# Allegro board OSCILLATOR.brd
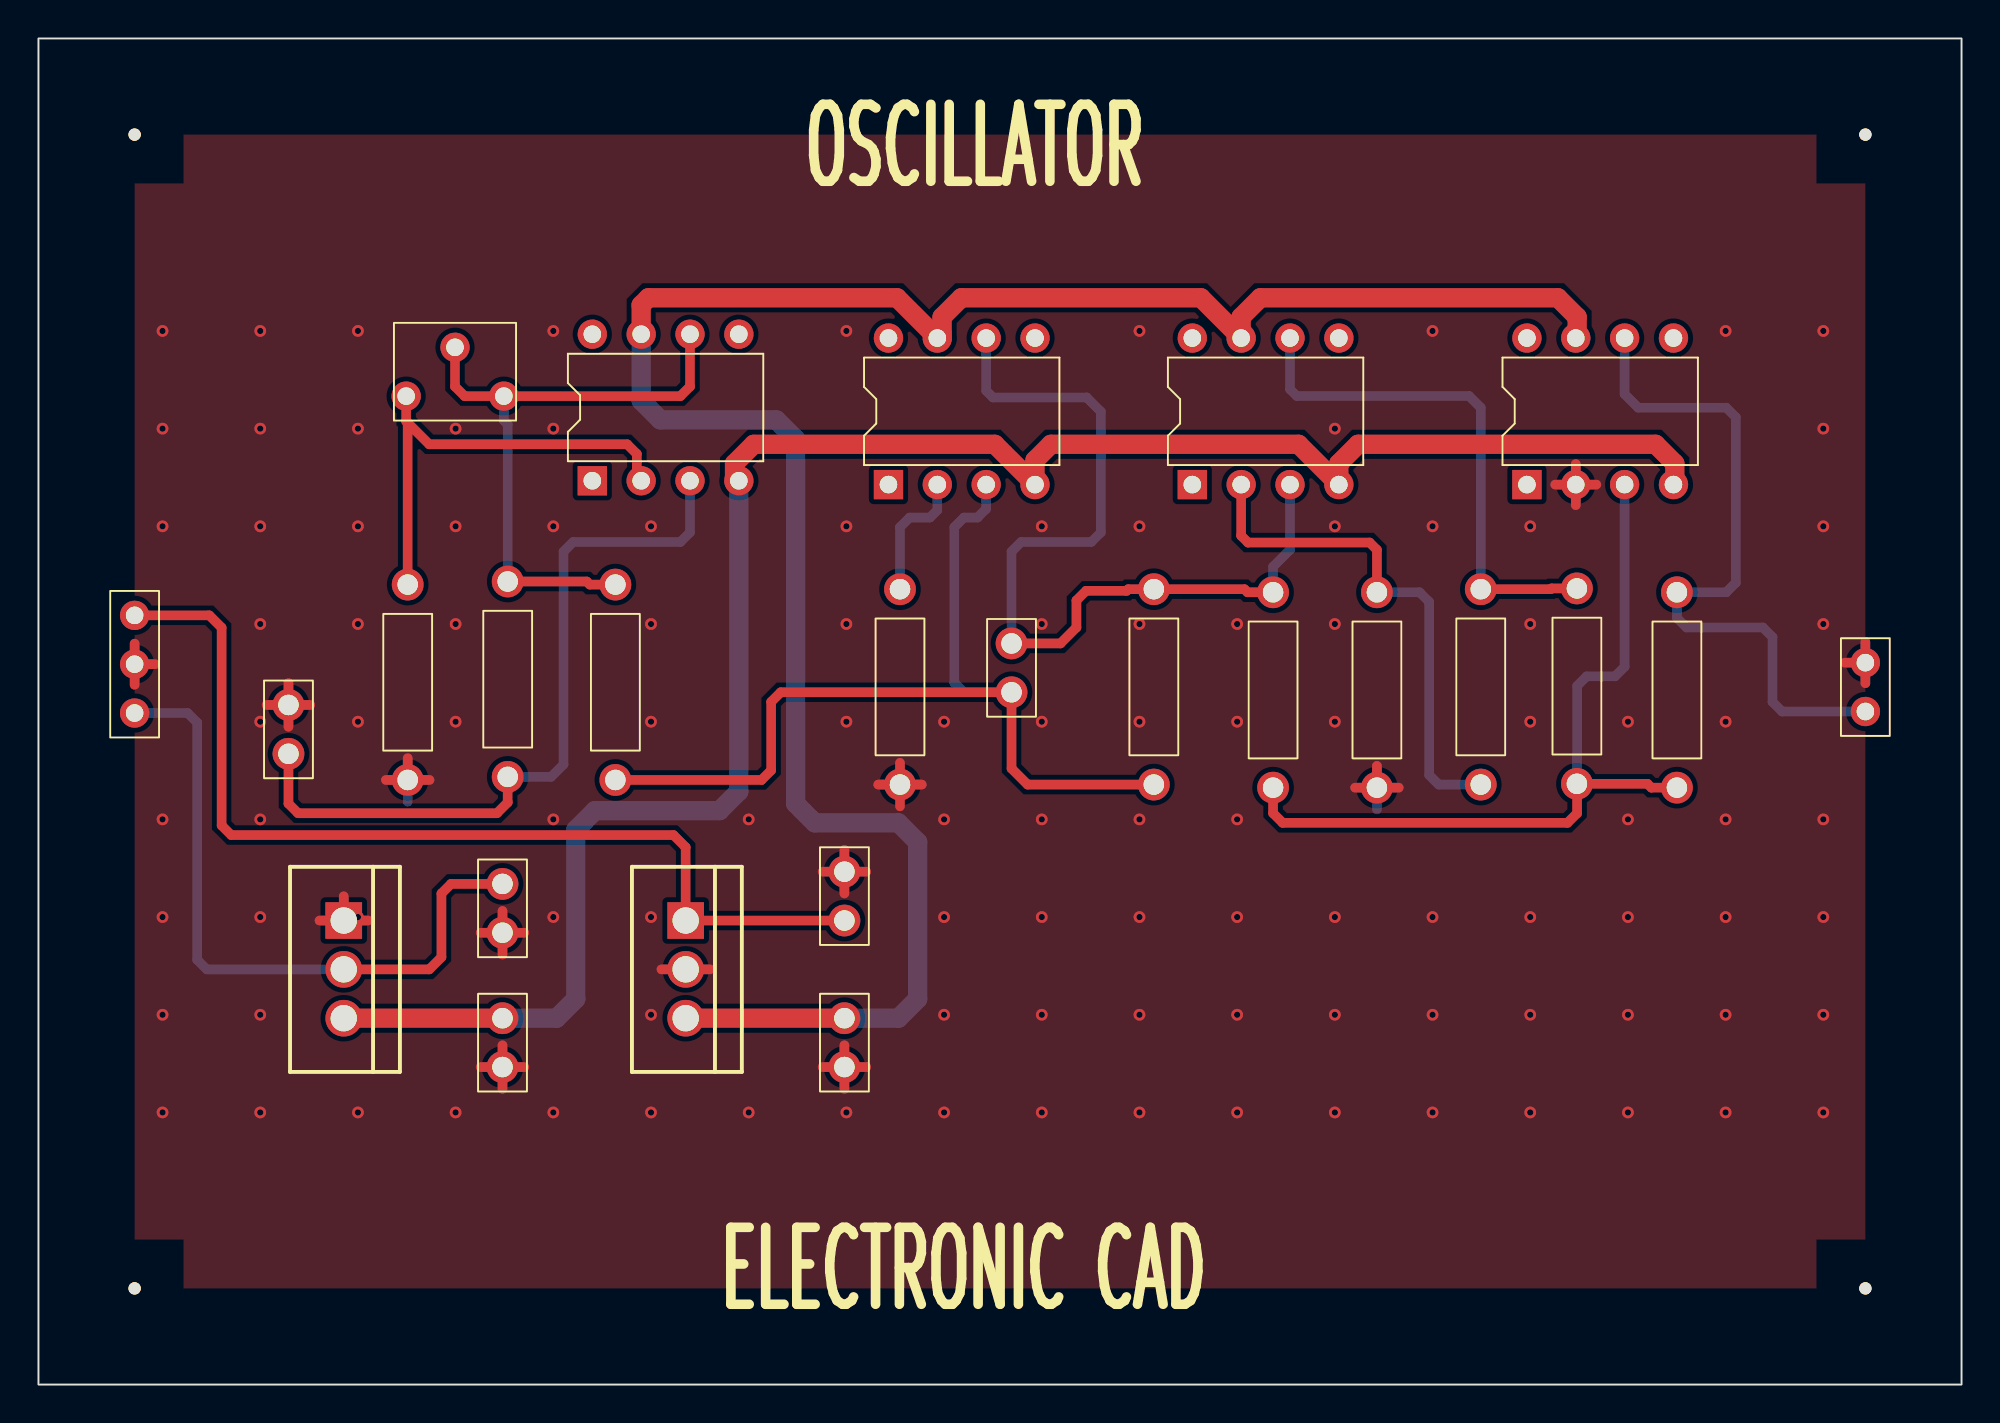
[diagram p0: board, top side]
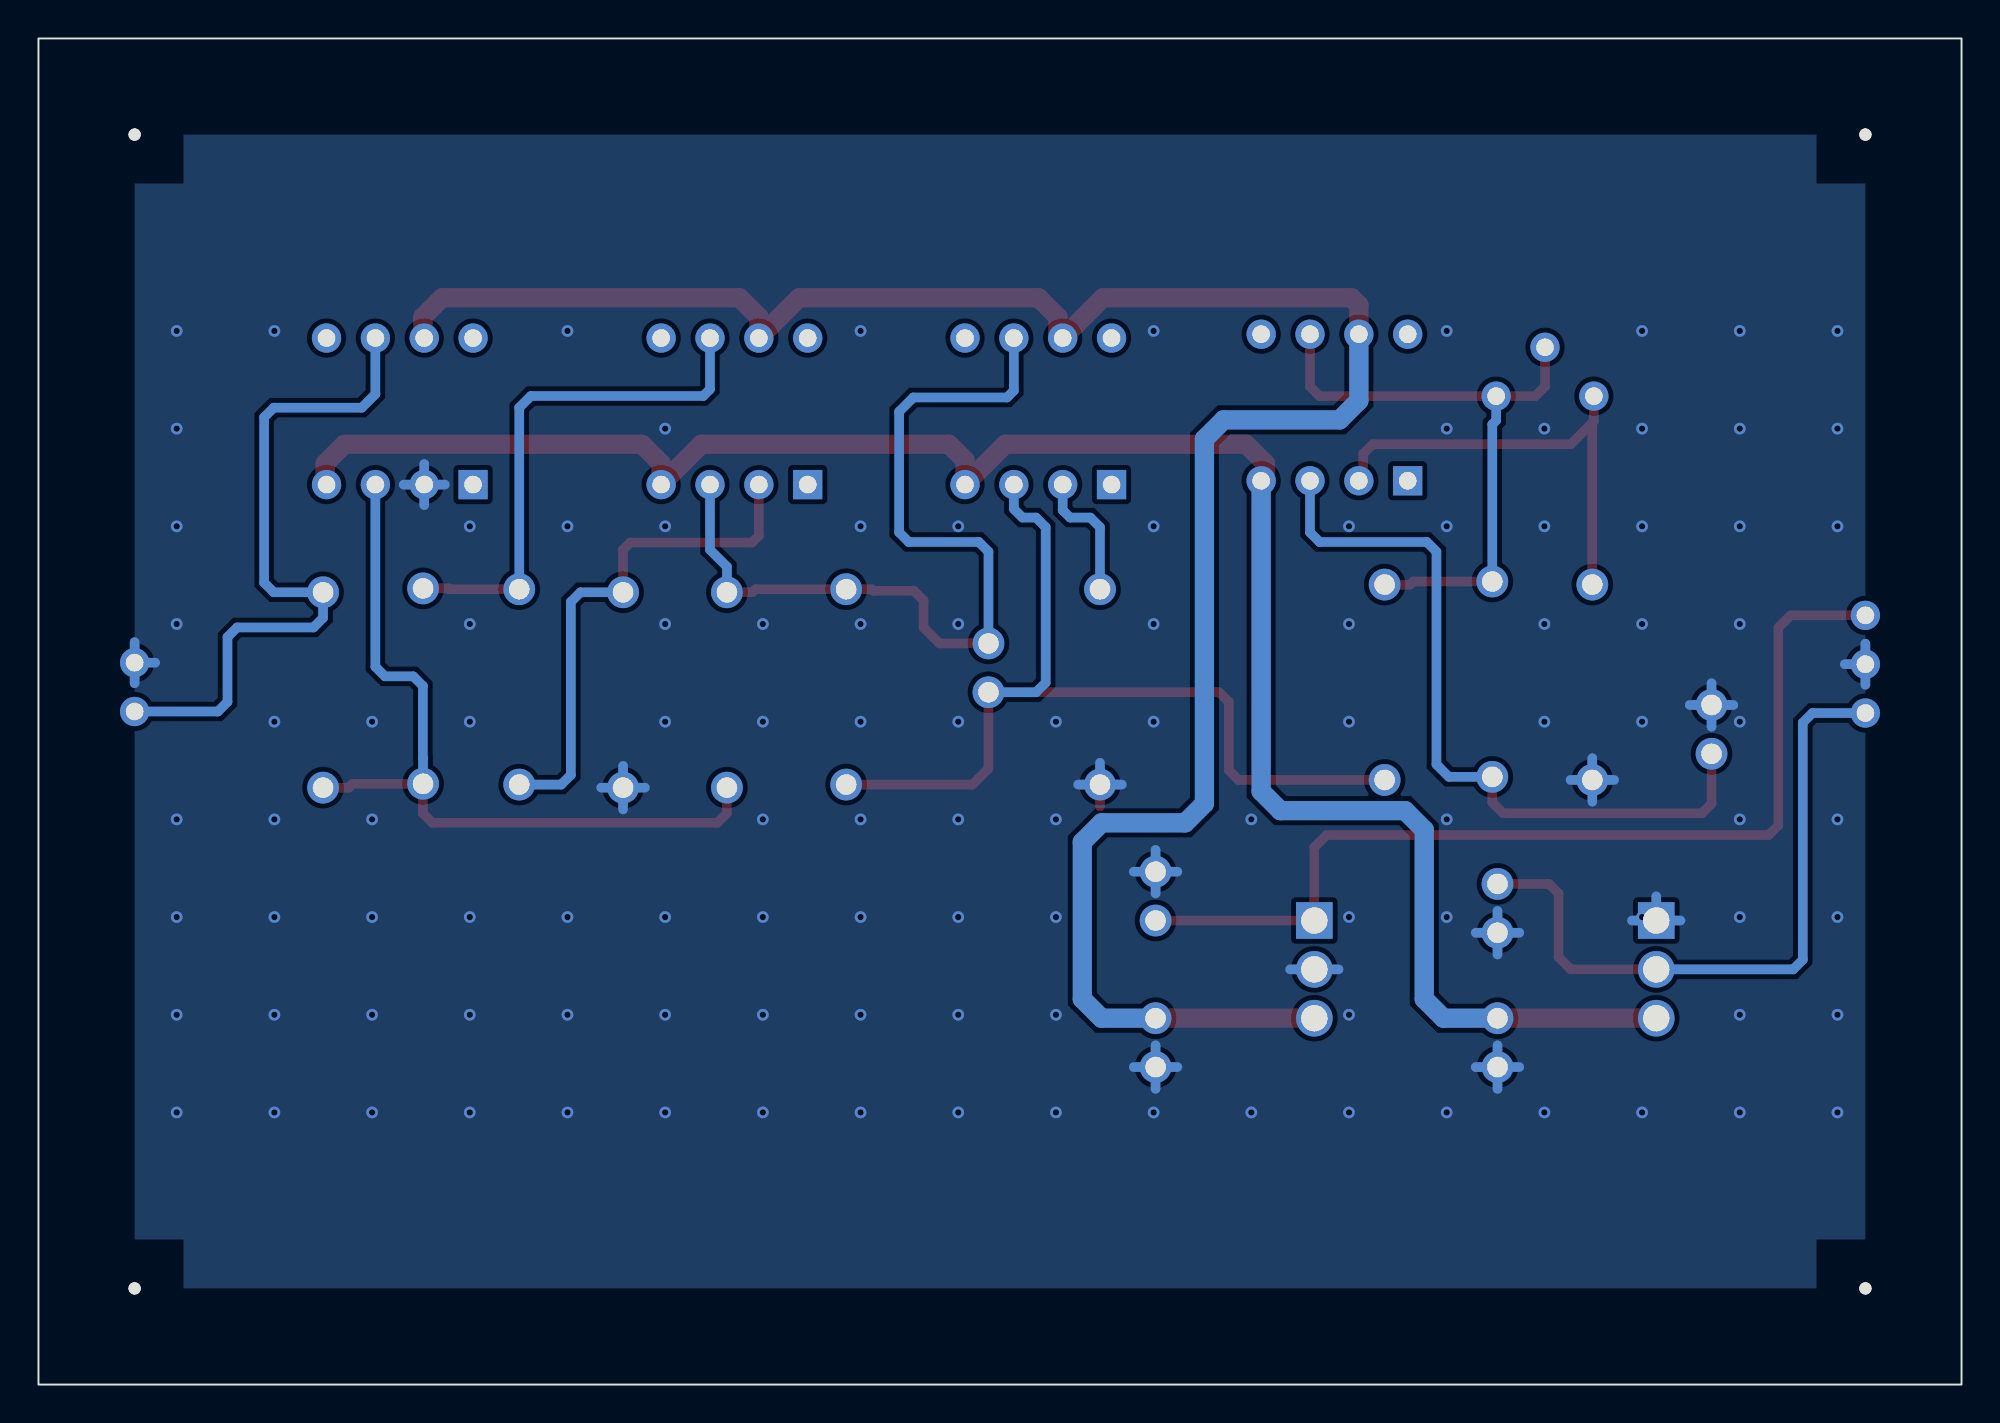
[diagram p1: board, bottom side, seen from below]

Outline 100 x 70 mm; copper layers: TOP, BOTTOM. Coordinates in mm from the lower left corner of the outline.
Outline path: rectangle 0,0 100,70

## Design rules (mm)
constraint set DEFAULT: min track width 0.5
nets with their own width: min track width 1; nets +VCC -VCC GND

## Placement (name value [footprint] x y rotation side)
C1  0.001uF  [CAPCK05]  50.6 36 0 top
C2  270pF  [CAPCK05]  13 32.8 0 top
C3  0.1uF  [CAPCK05]  41.91 24.13 0 top
C4  0.1uF  [CAPCK05]  41.91 19.05 180 top
C5  0.1uF  [CAPCK05]  24.13 23.5 0 top
C6  0.1uF  [CAPCK05]  24.13 16.51 0 top
J1  CON2  [JUMPER2]  95 35 90 top
J2  CON3  [JUMPER3]  5 40 270 top
NOREF  -  [unnamed]  95 5 0 top
NOREF#2  -  [#2]  0 70 0 top
NOREF#3  -  [unnamed]  5 5 0 top
NOREF#4  -  [unnamed]  95 65 0 top
NOREF#5  -  [#2]  100 0 90 top
NOREF#6  -  [unnamed]  5 65 0 top
R1  10k  [RES400]  24.4 31.6 0 top
R2  100k  [RES400]  58 31.2 0 top
R3  10k  [RES400]  64.2 41.2 180 top
R4  10k  [RES400]  85.2 41.2 180 top
R5  62k  [RES400]  30 41.6 180 top
R6  10k  [RES400]  80 41.4 180 top
R7  1M  [RESADJ]  24.2 51.4 270 top
R8  10k  [RES400]  44.8 31.2 0 top
R9  10k  [RES400]  19.2 41.6 180 top
R10  10k  [RES400]  75 31.2 0 top
R11  10k  [RES400]  69.6 41.2 180 top
U1  LF351  [DIP8_3]  28.8 47 90 top
U2  LF351  [DIP8_3]  44.2 46.8 90 top
U3  LF351  [DIP8_3]  60 46.8 90 top
U4  LF351  [DIP8_3]  77.4 46.8 90 top
U5  LM7812C/TO220  [TO220AB]  33.66 24.13 270 top
U6  LM7912C/TO220  [TO220AB]  15.88 24.13 270 top

## Library data of the parts
C1-C6 = CAP NP: Tolerance: ***; User Part Number: ***
J1 = CON2: User Part Number: ***
J2 = CON3: User Part Number: ***
R1-R6 R8-R11 = R: Tolerance: ***; User Part Number: ***
R7 = POT: Tolerance: ***; User Part Number: ***
U1-U4 = LF351: Tolerance: ***; User Part Number: ***
U5 = LM7812C/TO220_2
U6 = LM7912C/TO220_3

## Footprints (pads in the part's own frame, mm; a bottom-side part is the same pattern mirrored in y, then rotated)
CAPCK05
  round 1.651 hole 1.067: 1(0,0) 2(0,2.54)
DIP8_3
  rect 1.524x1.524 hole 0.914: 1(0,0)
  round 1.524 hole 0.914: 2(0,-2.54) 3(0,-5.08) 4(0,-7.62) 5(7.62,-7.62) 6(7.62,-5.08) 7(7.62,-2.54) 8(7.62,0)
JUMPER2
  round 1.524 hole 0.914: 1(0,0) 2(2.54,0)
JUMPER3
  round 1.524 hole 0.914: 1(0,0) 2(2.54,0) 3(5.08,0)
RES400
  round 1.651 hole 1.067: 1(0,0) 2(0,10.16)
RESADJ
  round 1.524 hole 0.914: 1(0,0) 2(-2.54,-2.54) 3(0,-5.08)
TO220AB
  rect 1.905x1.905 hole 1.372: 1(0,0)
  round 1.905 hole 1.372: 2(2.54,0) 3(5.08,0)
unnamed
  round 0.635 hole 3.175 unplated: (0,0)

## Nets
+VCC: C4.1 U1.7 U2.7 U3.7 U4.7 U5.3(OUT)
-VCC: C6.2 U1.4(V-) U2.4(V-) U3.4(V-) U4.4(V-) U6.3(OUT)
GND: C2.2 C3.2 C4.2 C5.1 C6.1 J1.2 J2.2 R8.1 R9.2 R11.2 U4.2 U5.2 U6.1
OUT: J1.1 R4.1 U4.6
SIG: C1.2 R2.2 R3.1 U2.6 U3.3
N00074: R1.2 R5.1 R7.1 R7.2(WIPER) U1.6
N00088: C2.1 R1.1 U1.3
N00118: R7.3 R9.1 U1.2
N00642: R8.2 U2.2
N00651: C1.1 R2.1 R5.2 U2.3
N01456: R10.1 R11.1 U3.2
N01517: R3.2 R4.2 R6.2 U4.3
N02020: R6.1 R10.2 U3.6
N02322: C3.1 J2.1 U5.1
N02370: C5.2 J2.3 U6.2

Pads without a net: U1 1 5 8; U2 1 5 8; U3 1 5 8; U4 1 5 8

## Via types
v1: diameter 0.61, hole 0.33, TOP to BOTTOM, 110 vias

## Routing (per net, layer and track width the routed paths; a pad name or vN(x,y) marks a point on that pad's centre or on a via; arc(x,y) is an arc through that point)
+VCC: length 115.6
  TOP w1: U1.7 31.34,56.14 31.72,56.52 44.65,56.52 U2.7 46.99,54.67 46.99,55.52 47.99,56.52 60.45,56.52 U3.7 62.54,55.52 63.54,56.52 79.01,56.52 80.01,55.52 80.01,54.49 U4.7 ; U5.3 C4.1
  BOTTOM w1: C4.1 44.72,19.05 45.72,20.05 45.72,28.21 44.72,29.21 40.37,29.21 39.37,30.21 39.37,49.16 38.37,50.16 32.34,50.16 31.34,51.16 U1.7
-VCC: length 103.4
  TOP w1: U6.3 C6.2 ; U4.4 85.09,46.87 85.09,47.9 84.09,48.9 68.62,48.9 67.62,47.9 U3.4 65.53,48.9 52.65,48.9 51.82,48.07 U2.4 49.73,48.9 37.2,48.9 36.2,47.9 36.2,47.23 U1.4
  BOTTOM w1: C6.2 26.94,19.05 27.94,20.05 27.94,28.84 28.94,29.84 35.42,29.84 36.42,30.84 U1.4
GND: length 103.1
  TOP w0.5: U6.1 17.14,24.13 ; U6.1 14.62,24.13 ; U6.1 15.88,25.39 ; R11.2 69.6,32.17 ; R11.2 68.47,31.04 ; R11.2 70.73,31.04 ; 5,36.39 J2.2 ; J2.2 6.07,37.46 ; J2.2 5,38.53 ; 41.91,25.54 C3.2 ; C3.2 40.78,26.67 ; C3.2 43.04,26.67 ; C3.2 41.91,27.8 ; 18.07,31.44 R9.2 ; R9.2 20.33,31.44 ; R9.2 19.2,32.57 ; J1.2 95,38.61 ; J1.2 95,36.47 ; J1.2 93.93,37.54 ; 34.91,21.59 U5.2 32.4,21.59 ; 11.87,35.34 C2.2 ; C2.2 13,36.47 ; C2.2 13,34.21 ; C2.2 14.13,35.34 ; 24.13,22.36 C5.1 ; C5.1 24.13,24.63 ; C5.1 25.26,23.5 ; C5.1 23,23.5 ; U4.2 81.01,46.8 ; U4.2 79.94,45.73 ; U4.2 78.87,46.8 ; U4.2 79.94,47.87 ; 44.8,30.07 R8.1 ; R8.1 45.93,31.2 ; R8.1 43.67,31.2 ; R8.1 44.8,32.33 ; 24.13,15.38 C6.1 ; C6.1 23,16.51 ; C6.1 25.26,16.51 ; C6.1 24.13,17.64 ; 41.91,15.38 C4.2 ; C4.2 41.91,17.64 ; C4.2 43.04,16.51 ; C4.2 40.78,16.51
  BOTTOM w0.5: C5.1 25.26,23.5 ; C5.1 24.13,22.36 ; C5.1 24.13,24.63 ; C5.1 23,23.5 ; R9.2 20.33,31.44 ; R9.2 18.07,31.44 ; R9.2 19.2,30.31 ; R9.2 19.2,32.57 ; 32.4,21.59 U5.2 34.91,21.59 ; C2.2 14.13,35.34 ; C2.2 11.87,35.34 ; C2.2 13,36.47 ; C2.2 13,34.21 ; U6.1 15.88,25.39 ; U6.1 17.14,24.13 ; U6.1 14.62,24.13 ; R8.1 45.93,31.2 ; R8.1 43.67,31.2 ; R8.1 44.8,32.33 ; C3.2 43.04,26.67 ; C3.2 41.91,27.8 ; C3.2 40.78,26.67 ; C3.2 41.91,25.54 ; C6.1 25.26,16.51 ; C6.1 23,16.51 ; C6.1 24.13,17.64 ; C6.1 24.13,15.38 ; 78.87,46.8 U4.2 ; U4.2 79.94,47.87 ; U4.2 79.94,45.73 ; U4.2 81.01,46.8 ; J1.2 95,38.61 ; J1.2 93.93,37.54 ; J1.2 95,36.47 ; J2.2 5,38.53 ; J2.2 6.07,37.46 ; J2.2 5,36.39 ; R11.2 69.6,32.17 ; R11.2 69.6,29.91 ; R11.2 68.47,31.04 ; R11.2 70.73,31.04 ; 40.78,16.51 C4.2 ; C4.2 41.91,17.64 ; C4.2 43.04,16.51 ; C4.2 41.91,15.38
  vias: v1(6.45,54.79) v1(6.45,49.71) v1(6.45,44.63) v1(6.45,29.39) v1(6.45,24.31) v1(6.45,19.23) v1(6.45,14.15) v1(11.53,54.79) v1(11.53,49.71) v1(11.53,44.63) v1(11.53,39.55) v1(11.53,34.47) v1(11.53,29.39) v1(11.53,24.31) v1(11.53,19.23) v1(11.53,14.15) v1(16.61,54.79) v1(16.61,49.71) v1(16.61,44.63) v1(16.61,39.55) v1(16.61,34.47) v1(16.61,24.31) v1(16.61,14.15) v1(21.69,49.71) v1(21.69,44.63) v1(21.69,39.55) v1(21.69,34.47) v1(21.69,14.15) v1(26.77,54.79) v1(26.77,49.71) v1(26.77,44.63) v1(26.77,29.39) v1(26.77,24.31) v1(26.77,14.15) v1(31.85,44.63) v1(31.85,39.55) v1(31.85,34.47) v1(31.85,24.31) v1(31.85,19.23) v1(31.85,14.15) v1(36.93,29.39) v1(36.93,14.15) v1(42.01,54.79) v1(42.01,44.63) v1(42.01,39.55) v1(42.01,34.47) v1(42.01,14.15) v1(47.09,34.47) v1(47.09,29.39) v1(47.09,24.31) v1(47.09,19.23) v1(47.09,14.15) v1(52.17,44.63) v1(52.17,39.55) v1(52.17,34.47) v1(52.17,29.39) v1(52.17,24.31) v1(52.17,19.23) v1(52.17,14.15) v1(57.25,54.79) v1(57.25,44.63) v1(57.25,39.55) v1(57.25,34.47) v1(57.25,29.39) v1(57.25,24.31) v1(57.25,19.23) v1(57.25,14.15) v1(62.33,39.55) v1(62.33,34.47) v1(62.33,29.39) v1(62.33,24.31) v1(62.33,19.23) v1(62.33,14.15) v1(67.41,49.71) v1(67.41,44.63) v1(67.41,39.55) v1(67.41,34.47) v1(67.41,24.31) v1(67.41,19.23) v1(67.41,14.15) v1(72.49,54.79) v1(72.49,44.63) v1(72.49,24.31) v1(72.49,19.23) v1(72.49,14.15) v1(77.57,44.63) v1(77.57,39.55) v1(77.57,34.47) v1(77.57,24.31) v1(77.57,19.23) v1(77.57,14.15) v1(82.65,34.47) v1(82.65,29.39) v1(82.65,24.31) v1(82.65,19.23) v1(82.65,14.15) v1(87.73,54.79) v1(87.73,34.47) v1(87.73,29.39) v1(87.73,24.31) v1(87.73,19.23) v1(87.73,14.15) v1(92.81,54.79) v1(92.81,49.71) v1(92.81,44.63) v1(92.81,39.55) v1(92.81,29.39) v1(92.81,24.31) v1(92.81,19.23) v1(92.81,14.15)
OUT: length 36.2
  BOTTOM w0.5: U4.6 82.48,51.51 83.19,50.8 87.77,50.8 88.27,50.3 88.27,41.7 87.77,41.2 R4.1 85.2,39.87 85.7,39.37 89.67,39.37 90.17,38.87 90.17,35.5 90.67,35 J1.1
SIG: length 46.9
  TOP w0.5: C1.2 53.15,38.54 53.98,39.37 53.98,40.77 54.48,41.27 56.59,41.27 56.67,41.36 R2.2 62.71,41.36 62.87,41.2 R3.1
  BOTTOM w0.5: U3.3 65.08,43.41 64.2,42.53 R3.1 ; U2.6 49.28,51.69 49.63,51.33 54.51,51.33 55.24,50.59 55.24,44.31 54.74,43.81 51.1,43.81 50.6,43.31 C1.2
N00074: length 32.8
  TOP w0.5: U1.6 33.88,51.9 33.38,51.4 R7.1 22.16,51.4 21.66,51.9 R7.2 ; R5.1 28.67,41.6 28.51,41.76 R1.2
  BOTTOM w0.5: R1.2 24.4,49.93 24.2,50.13 R7.1
N00088: length 39.7
  TOP w0.5: C2.1 13,30.21 13.5,29.71 23.84,29.71 24.4,30.27 R1.1
  BOTTOM w0.5: U1.3 33.88,44.31 33.38,43.81 27.8,43.81 27.3,43.31 27.3,32.25 26.66,31.6 R1.1
N00118: length 23.9
  TOP w0.5: 19.2,50.02 20.32,48.9 30.61,48.9 31.11,48.4 31.11,47.23 U1.2 ; 19.2,50.02 R9.1 ; 19.2,50.02 19.12,50.09 R7.3
N00642: length 6.9
  BOTTOM w0.5: R8.2 44.8,44.59 45.3,45.09 46.35,45.09 46.74,45.47 U2.2
N00651: length 50.9
  TOP w0.5: R2.1 51.44,31.2 50.6,32.03 C1.1 38.6,36 38.1,35.5 38.1,31.94 37.6,31.44 R5.2
  BOTTOM w0.5: U2.3 49.28,45.53 48.83,45.09 48.12,45.09 47.62,44.59 47.62,36.5 48.13,36 C1.1
N01456: length 27
  TOP w0.5: U3.2 62.54,44.14 62.89,43.79 69.22,43.79 69.6,43.41 R11.1
  BOTTOM w0.5: R11.1 71.81,41.2 72.31,40.7 72.31,31.7 72.81,31.2 R10.1
N01517: length 41.8
  TOP w0.5: R4.2 83.87,31.04 83.67,31.24 R6.2 80.01,31.23 80.01,29.71 79.51,29.21 64.7,29.21 64.2,29.71 R3.2
  BOTTOM w0.5: R6.2 80,32.57 80.01,32.58 80.01,36.33 80.51,36.83 81.98,36.83 82.48,37.33 U4.3
N02020: length 27.4
  TOP w0.5: R6.1 78.67,41.4 78.63,41.36 R10.2
  BOTTOM w0.5: R10.2 75,50.8 74.39,51.41 65.43,51.41 65.08,51.76 U3.6
N02322: length 51.7
  TOP w0.5: C3.1 U5.1 33.66,27.94 33.02,28.57 10.03,28.57 9.53,29.07 9.53,39.36 8.88,40 J2.1
N02370: length 35.7
  TOP w0.5: C5.2 21.45,26.04 20.95,25.54 20.95,22.23 20.32,21.59 U6.2
  BOTTOM w0.5: J2.3 7.75,34.92 8.26,34.42 8.26,22.09 8.76,21.59 U6.2

## Copper pours and planes (outline as drawn; the poured copper is in the pictures)
GND on TOP, BOTTOM: 95,5 95,65 5,65 5,5

## Text on the board
Ref Des/Silkscreen Top: ELECTRONIC CAD | OSCILLATOR
DIMENSION: FIGURE | FINISHED_SIZE | 0.914 | 1.067 | 1.372 | 3.175 | DRILL CHART: TOP to BOTTOM | ALL UNITS ARE IN MILLIMETERS | PLATED | NON-PLATED | QTY | 40 | 32 | 6 | 4
